# Altium PCB SRT-WREN-25-22-V103.PcbDoc
Units mm, origin at the board's own origin, x right, y up, seen from the top; angles counter-clockwise.
Board outline 30.73 x 24.64 mm, 2 copper layers (Top Layer, Bottom Layer); 21 components, 20 nets, 98 pads, 49 vias.
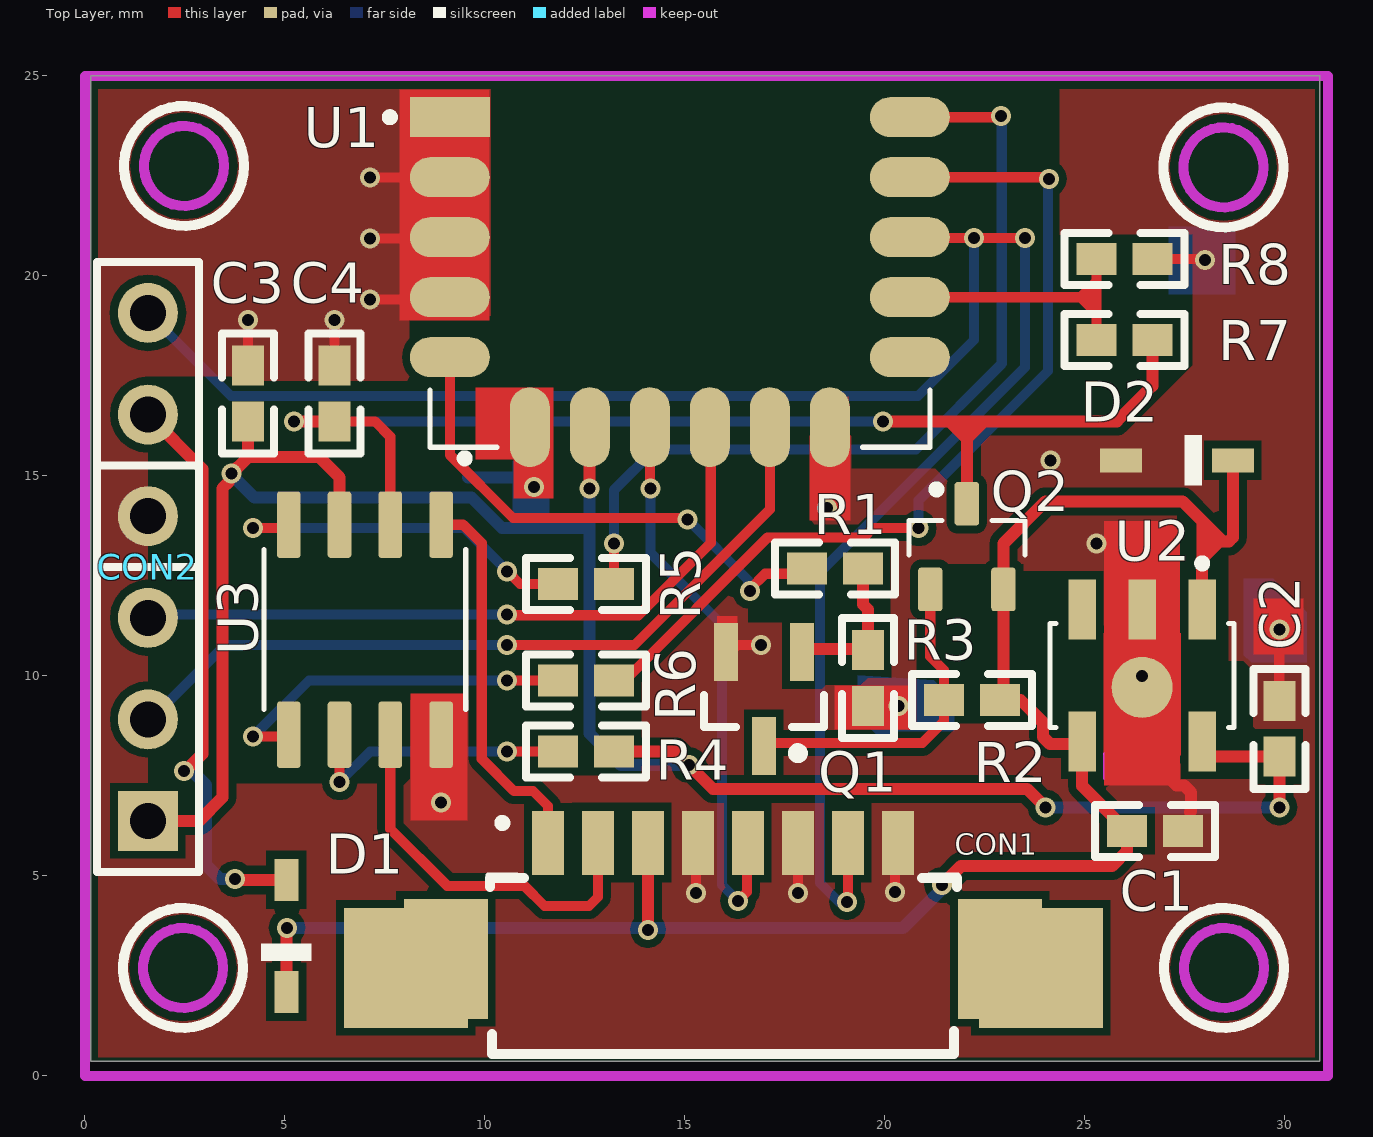
[diagram p0: Top Layer view]
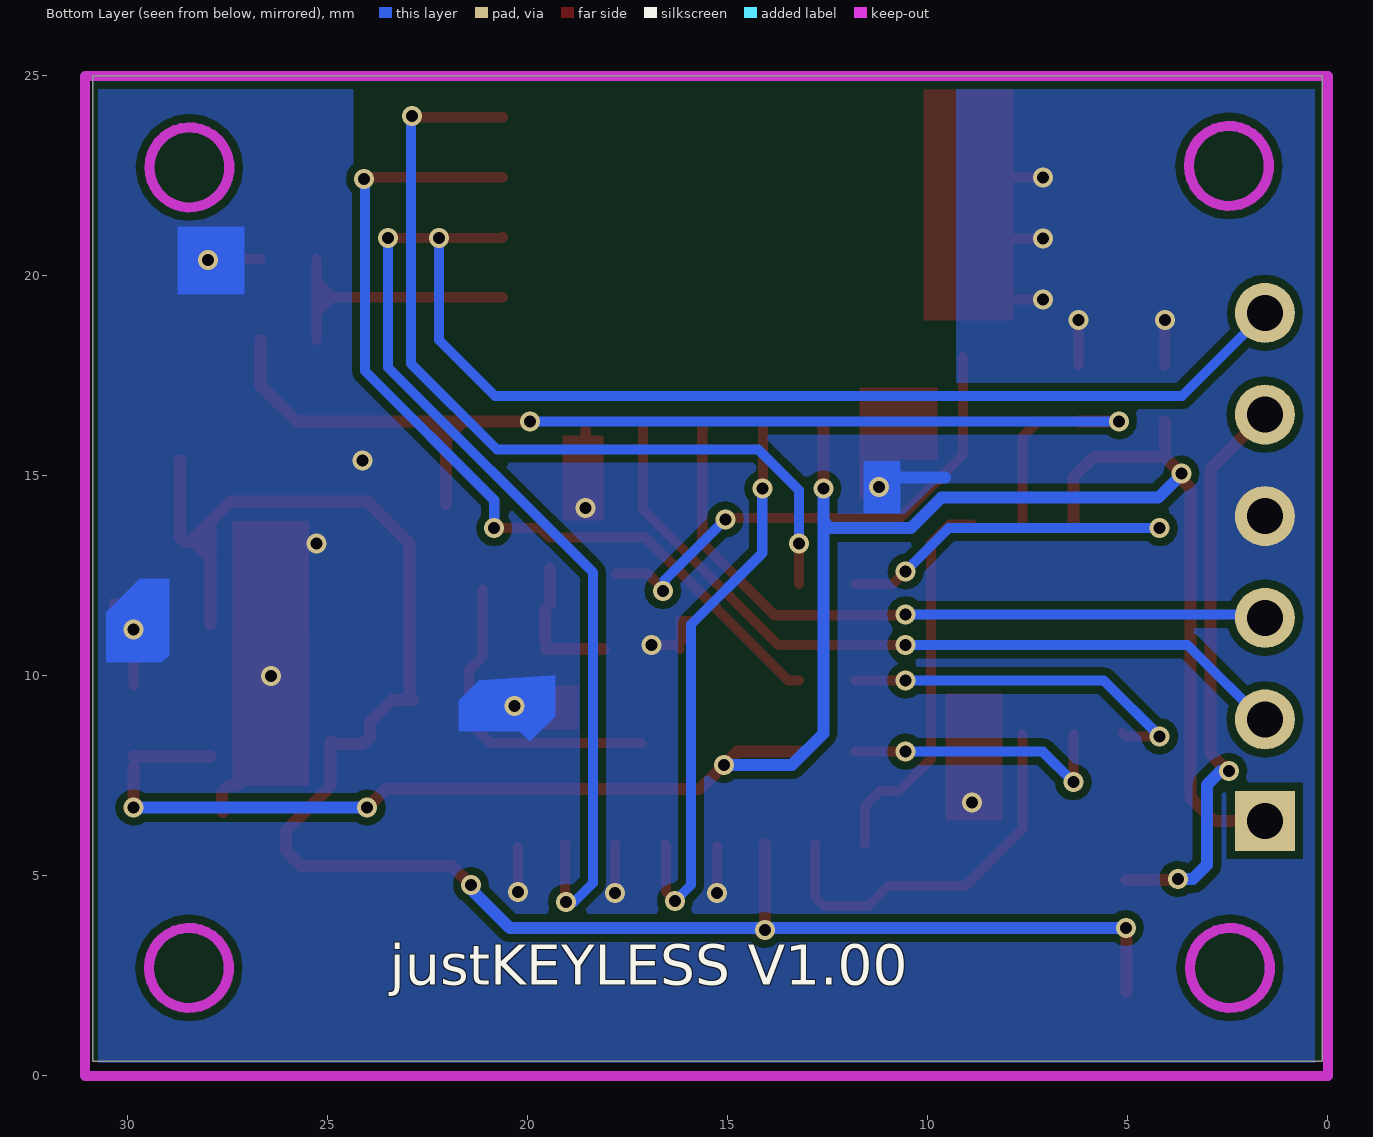
[diagram p1: Bottom Layer view, seen from below]

## Layer stack, top to bottom
Top Layer: signal copper 0.0356
Dielectric: dielectric 0.32, FR-4, Dk 4.8
Bottom Layer: signal copper 0.0356

## Board outline
0.141,25 0.141,0.362 30.875,0.362 30.875,25 0.141,25

## Design rules (kind name [scope] priority, off if disabled: settings)
Clearance [All] p1: gap=0.2
Clearance Clearance_2 [All] p2: gap=0.254
Clearance Clearance_1 [All] p3: gap=0.254
PolygonConnect [All] p1: connectstyle=Direct reliefconductorwidth=0.254 reliefentries=4 polygonreliefangle="90 Angle"
RoutingVias [All] p1: holewidth=0.5 width=0.3 viastyle="Through Hole" minholewidth=0.4 minwidth=0.2 maxholewidth=0.711 maxwidth=1.27
SilkToSilkClearance [All] p1: silktosilkclearance=0.054
SilkscreenOverComponentPads [IsPad] p1: minsilkscreentomaskgap=0.254
SolderMaskExpansion [All] p1: expansion=0.102
Width [InNet('FWD')] p1: maxlimit=0.3 minlimit=0.254 preferedwidth=0.254 minimp=50.000000 maximp=50.000000 favimp=50.000000
26 further rules are at their usual default settings.

## Components (designator, comment, footprint, x,y, rotation, side; value= is the part's Value field where it differs from the comment)
C1 "10uF" 0603_C 27.45,6.125 r180 top
C2 "10uF" 0603_C 29.859,9.379 r270 top
C3 "10uF" 0603_C 4.078,17.761 r270 top
C4 "10uF" 0603_C 6.237,17.761 r270 top
CON1 "8pin 1.25" "8Pin 1.25mm SMT" 11.575,5.8 r0 top
CON2 "6pin 2.54" "6PIN 2.54" 1.575,6.375 r90 top
D1 "1N4148WS" SOD323 5,3.725 r90 top
D2 "1N4148WS" SOD323 27.075,15.35 r180 top
Q1 "BC847" BC846 16.975,9.425 r270 top
Q2 "Q2" SOT_523_P_MOS 22.112,13.189 r90 top
R1 "10K" 0603_R 19.445,12.681 r180 top
R2 "10K" 0603_R 22.874,9.403 r180 top
R3 "10K(DNM)" 0603_R 19.572,9.252 r90 top
R4 "10K" 0603_R 11.825,8.109 r0 top
R5 "100E" 0603_R 11.825,12.3 r0 top
R6 "100E" 0603_R 11.825,9.887 r0 top
R7 "10K" 0603_R 26.684,18.396 r180 top
R8 "10K" 0603_R 25.287,20.428 r0 top
U1 "DA14531" DA14531 14.873,22.333 r0 top
U2 "XC6220B331PR-G" CONV_AL8861Y-13 26.43,10.014 r270 top
U3 "ZXBM5210" SOIC127P600X180-8N 6.999,11.157 r270 top

## Footprints (in the part's own frame and the unit in brackets; to place one, negate y for a bottom-side part, rotate by r counter-clockwise, add the part's x,y. Pads: shape width x height; smd on the part's side, far side on the other; paste and mask are expansions set on the pad)
"6PIN 2.54" [mm]
  rect 1.5x1.5 hole 0.9: 1(0,0)
  round 1.5 hole 0.9: 2(2.54,0) 3(5.08,0) 4(7.62,0) 5(10.16,0) 6(12.7,0)
  silkscreen extent -1.27,-1.27 13.97,1.27
"8Pin 1.25mm SMT" [mm]
  rect 0.8x1.6 smd: 1(0,0.025) 2(1.25,0.025) 3(2.5,0.025) 4(3.75,0.025) 5(5,0.025) 6(6.25,0.025) 7(7.5,0.025) 8(8.75,0.025)
  rect 3.1x3 smd: ""(-3.55,-3.1) ""(12.326,-3.1)
  rect 2.1x3 smd: ""(-2.55,-2.875) ""(11.3,-2.875)
  silkscreen extent -1.5,-5.25 10.25,0.62
0603_C [mm]
  rect 1x0.8 smd: 1(0,0) 2(1.397,0)
  silkscreen extent -0.8,-0.65 2.2,0.65
0603_R [mm]
  rect 1x0.8 smd: 1(0,0) 2(1.397,0)
  silkscreen extent -0.8,-0.65 2.2,0.65
BC846 [mm]
  rect 1.45x0.6 smd: 1(1.181,-0.002) 2(-1.169,-0.952) 3(-1.169,0.948)
  silkscreen extent -0.09,-1.5 1.48,1.5, body extent -0.69,-1.5 0.71,1.5, height 1.1
CONV_AL8861Y-13 [mm]
  rect 1.5x0.68 smd: 1(-1.65,1.5) 3(-1.65,-1.5) 4(1.65,-1.5) 5(1.65,1.5)
  rect 1.5x0.68 smd paste-2 mask+0: 2(-1.65,0)
  round 1.524 smd: 2(0.3,0)
  Top Layer region: 2,-0.965 -1.05,-0.965 -1.05,-0.34 -2.25,-0.34 -2.25,0.34 -1.05,0.34 -1.05,0.965 2,0.965
  silkscreen extent -2.9,-2.3 1.3,2.3
DA14531 [mm]
  rect 0.1x0.1 smd paste-1 mask+0: J1(-5.75,1.635) J2(-5.75,0.135) J3(-5.75,-1.365) J4(-5.75,-2.865) J5(-5.75,-4.365) J6(-3.75,-6.115) J7(-2.25,-6.115) J8(-0.75,-6.115) J9(0.75,-6.115) J10(2.25,-6.115) J11(3.75,-6.115) J12(5.75,-4.365) J13(5.75,-2.865) J14(5.75,-1.365) J15(5.75,0.135) J16(5.75,1.635)
  rect 2x1 smd: J1(-5.75,1.635)
  oval 2x1 smd: J2(-5.75,0.135) J3(-5.75,-1.365) J4(-5.75,-2.865) J5(-5.75,-4.365) J12(5.75,-4.365) J13(5.75,-2.865) J14(5.75,-1.365) J15(5.75,0.135) J16(5.75,1.635)
  oval 1x2 smd: J6(-3.75,-6.115) J7(-2.25,-6.115) J8(-0.75,-6.115) J9(0.75,-6.115) J10(2.25,-6.115) J11(3.75,-6.115)
  silkscreen extent -7.35,-6.62 6.25,1.73
SOD323 [mm]
  rect 1.05x0.6 smd: A(1.176,-0.037) C(-1.624,-0.037)
  silkscreen extent -0.85,-0.66 -0.42,0.59
SOIC127P600X180-8N [mm]
  rrect25% 1.66x0.59 smd: 1(-2.625,1.905) 2(-2.625,0.635) 3(-2.625,-0.635) 4(-2.625,-1.905) 5(2.625,-1.905) 6(2.625,-0.635) 7(2.625,0.635) 8(2.625,1.905)
  silkscreen extent -4.38,-2.52 2,2.59
SOT_523_P_MOS [mm]
  rrect25% 1.09x0.61 smd: 1(1.115,0.065) 2(-1.025,0.98) 3(-1.025,-0.85)
  silkscreen extent -0.16,-1.39 1.57,1.51

## Part data
C1 C2 C3 C4: library part Cap, "Capacitor"
D1 D2: library part 1N4148W-TP, "Diode Standard 100V 150mA Surface Mount SOD-123"
Q1: library part BC846X
Q2: library part PMOS
R1 R2 R3 R4 R5 R6 R7 R8: library part Res3, "Resistor"
U2: library part Component_1

## Via types
v1: diameter 0.5, hole 0.3, Top Layer to Bottom Layer, 49 vias

## Nets (pads, with @x,y where several pads share a name; then routed paths per layer and width w, separated by ;. In a path a pad name is that pad's centre, name@x,y a point inside that pad or via, vN(x,y) a via of type N, cw(c..) or ccw(c..) an arc to the next point about the centre after c; other vN are vias at no path point)
3V3: C2.2 C3.2 CON2.1 R4.2 U1.J7 U2.5 U3.3 | length 55.5
  Top Layer w0.3: CON2.1 2.85,6.375 3.436,6.961 3.436,14.691 v1@3.605,14.861 ; v1@3.627,15.024 4.078,15.475 ; C3.2 4.078,15.475 ; U3.3 6.364,14.964 5.853,15.475 4.078,15.475 ; v1(12.616,14.687) 12.616,16.211 U1.J7@12.623,16.218 ; R4.2 14.766,8.109 15.706,7.169 17.418,7.169 17.424,7.175 23.554,7.175 v1(24.017,6.712) ; U2.5@27.93,7.983 27.931,7.982 C2.2 ; v1(29.859,6.712) C2.2@29.859,7.733
  Bottom Layer w0.3: v1(3.665,15.062) 3.665,15.033 4.239,14.459 9.666,14.459 10.428,13.697 12.44,13.697 12.616,13.873 ; v1(12.616,14.687) 12.616,13.873 ; v1(15.1,7.775) 13.4,7.775 12.616,8.559 12.616,13.873 ; v1(24.017,6.712) v1(29.859,6.712)
+VBAT: C1.2 CON1.3 D1.C D2.C Q2.3 R2.1 U2.1 U2.4 | length 46.4
  Top Layer w0.3: D1.C v1@5.037,3.687 ; v1(14.075,3.65) CON1.3@14.075,5.8 ; v1(21.425,4.775) 21.9,5.25 25.675,5.25 26.053,5.628 C1.2 24.93,7.248 U2.4 24.866,8.3 24.126,8.3 23.95,8.476 23.95,8.836 23.383,9.403 R2.1 22.962,9.491 Q2.3 22.962,13.313 24.011,14.362 27.441,14.362 28.441,13.362 ; U2.1@27.93,11.283 U2.1 27.93,12.932 28.36,13.362 28.441,13.362 ; D2.C 28.699,13.466 28.595,13.362 28.441,13.362
  Bottom Layer w0.3: v1(5.05,3.7) 20.45,3.7 21.425,4.675 v1(21.425,4.775)
+VM: C4.2 Q2.1 R7.1 U3.2 | length 29.8
  Top Layer w0.254: C4.2 7.253,16.364 7.634,15.983 U3.2
  Top Layer w0.3: v1(5.221,16.364) C4.2 ; v1(19.953,16.364) 22.047,16.364 ; Q2.1 22.047,16.364 ; R7.1 26.684,17.253 25.795,16.364 22.047,16.364
  Bottom Layer w0.254: v1(5.221,16.364) v1(19.953,16.364)
FB1: CON1.7 CON2.6 U1.J14 | length 48.1
  Top Layer w0.254: v1(19.05,4.35) 19.075,4.375 CON1.7@19.075,5.8 ; U1.J14@20.623,20.968 20.641,20.95 v1(22.225,20.95) v1(23.498,20.95)
  Bottom Layer w0.254: CON2.6 3.65,17 20.825,17 22.225,18.4 v1(22.225,20.95) ; v1(19.05,4.35) 18.85,4.35 18.375,4.825 18.375,12.591 23.498,17.714 v1(23.498,20.95)
FB2: CON1.5 U1.J8 | length 14.3
  Top Layer w0.254: v1@14.123,14.705 U1.J8@14.123,16.218 ; v1(16.325,4.375) 16.55,4.6 16.55,5.775 CON1.5@16.575,5.8
  Bottom Layer w0.254: v1(14.141,14.687) 14.141,13.07 15.925,11.286 15.925,4.775 v1(16.325,4.375)
FWD: R5.2 U1.J16 | length 21.9
  Top Layer w0.254: R5.2 v1(13.222,13.316) ; U1.J16@20.623,23.968 v1@22.9,23.968
  Bottom Layer w0.254: v1(13.222,13.316) 13.222,14.643 14.241,15.662 20.775,15.662 22.921,17.808 v1@22.921,24.064
  other v1: 22.9,24
GND: C1.1 C2.1 C3.1 C4.1 CON1.4 CON1.6 CON1.8 CON2.4 D2.A Q1.2 R3.1 R8.2 U1.J1 U1.J2 U1.J3 U1.J4 U1.J6 U1.J11 U2.2 U3.8 | length 29
  Top Layer w0.254: C3.1 v1(4.078,18.904) ; C4.1 v1(6.237,18.904) ; v1(7.126,19.412) 9.067,19.412 U1.J4@9.123,19.468 ; v1(7.126,20.936) 9.091,20.936 U1.J3@9.123,20.968 ; v1(7.126,22.46) 9.115,22.46 U1.J2@9.123,22.468 ; v1(8.904,6.839) U3.8 ; U1.J6@11.123,16.218 11.266,16.075 11.266,15.184 11.3,15.15 11.225,15.075 v1(11.225,14.725) ; v1(15.275,4.575) CON1.4@15.275,5.75 ; Q1.2@16.207,10.675 16.308,10.776 v1(16.905,10.776) ; v1(17.825,4.575) CON1.6@17.825,5.8 ; U1.J11@18.556,16.151 v1(18.556,14.205) v1@18.625,14.274 ; R3.1 v1(20.334,9.252) 20.334,9.622 ; v1(20.25,4.6) CON1.8@20.25,5.725 ; v1(24.141,15.387) v1@24.18,15.348 ; v1(25.287,13.316) 26.43,13.316 ; R8.2 27.972,20.428 v1(28,20.4) ; C2.1@29.859,9.76 v1(29.859,11.157)
  Top Layer w0.3: U2.2@26.43,10.014 26.43,9.714 26.43,8.12 27.286,7.264 27.474,7.264 27.65,7.088 27.65,6.625 27.625,6.6
  Bottom Layer w0.3: 9.576,14.959 11.169,14.959 v1@11.466,14.662
  other v1: 26.425,10
M1: CON1.1 U3.1 | length 9.7
  Top Layer w0.254: U3.1 9.454,13.782 9.92,13.316 9.92,7.928 10.723,7.125 11.2,7.125 11.575,6.75 CON1.1@11.575,5.8
M2: CON1.2 U3.7 | length 9.8
  Top Layer w0.254: U3.7 7.634,6.175 9.057,4.752 10.986,4.752 11.488,4.25 12.6,4.25 12.825,4.475 CON1.2@12.825,5.8
NetCON2_5: CON2.5 D1.A | length 14.5
  Top Layer w0.3: CON2.5 2.936,15.174 2.936,8.051 2.51,7.625 v1(2.475,7.625) ; v1@3.774,4.901 D1.A
  Bottom Layer w0.3: v1(2.475,7.625) 2.675,7.625 3.025,7.275 3.025,5.275 3.375,4.925 v1(3.75,4.925)
NetQ1_1: Q1.1 Q2.2 R2.2 | length 8
  Top Layer w0.254: Q1.1@17.157,8.325 20.931,8.325 21.477,8.871 R2.2 21.477,10.141 21.132,10.486 Q2.2
NetQ1_3: Q1.3 R1.1 R3.2 | length 3.3
  Top Layer w0.3: Q1.3@18.107,10.675 R3.2@19.546,10.675 ; R1.1 19.445,11.792 19.572,11.665 R3.2@19.572,10.9
NetR5_1: R5.1 U3.4 | length 9.1
  Top Layer w0.254: v1@4.205,13.824 v1(4.205,13.697) U3.4@5.009,13.697 ; v1@10.566,12.612 10.878,12.3 R5.1
  Bottom Layer w0.254: v1(4.205,13.697) 9.481,13.697 v1@10.566,12.612
  other v1: 10.555,12.612
NetR6_1: R6.1 U3.5 | length 9.1
  Top Layer w0.254: v1(4.205,8.49) U3.5@5.052,8.49 ; U3.5 U3.5@5.136,8.574 ; v1@10.682,9.887 R6.1
  Bottom Layer w0.254: v1(4.205,8.49) 5.602,9.887 v1(10.555,9.887) v1@10.682,9.887
REV: R6.2 U1.J15 | length 22.8
  Top Layer w0.254: R6.2 13.491,9.887 17.068,13.464 19.468,13.464 19.701,13.697 v1(20.842,13.697) ; U1.J15@20.623,22.468 24.057,22.468 v1(24.1,22.425)
  Bottom Layer w0.254: v1(20.842,13.697) 20.842,14.392 24.075,17.625 24.075,22.4 v1(24.1,22.425)
SWCLK: CON2.2 U1.J10 | length 19.9
  Top Layer w0.254: v1(10.555,10.776) 13.738,10.776 17.123,14.161 U1.J10@17.123,16.218
  Bottom Layer w0.254: CON2.2@1.525,8.79 3.511,10.776 v1(10.555,10.776)
SWDIO: CON2.3 U1.J9 | length 17.9
  Top Layer w0.254: v1(10.555,11.538) 10.574,11.519 13.839,11.519 15.643,13.323 15.643,16.198 U1.J9@15.623,16.218
  Bottom Layer w0.254: CON2.3@1.525,11.33 1.733,11.538 v1(10.555,11.538)
VADC: R7.2 R8.1 U1.J13 | length 6.7
  Top Layer w0.254: U1.J13@20.623,19.468 25.231,19.468 25.287,19.412 ; R7.2 25.287,19.412 ; R8.1 25.287,19.412
VM_EN: R1.2 U1.J5 | length 12.8
  Top Layer w0.254: U1.J5@9.123,17.968 9.123,15.53 10.702,13.951 v1@15.027,13.951 ; v1(16.625,12.125) 16.625,12.172 17.007,12.554 R1.2@17.794,12.554
  Bottom Layer w0.254: v1(15.066,13.912) 16.578,12.4 16.578,12.172 v1(16.625,12.125)
VREF: R4.1 U3.6 | length 6.7
  Top Layer w0.254: v1(6.364,7.347) U3.6 ; 10.809,8.109 R4.1
  Bottom Layer w0.254: v1(6.364,7.347) 7.126,8.109 v1(10.555,8.109)
pads on no net: CON1. U1.J12 U2.3

## Polygon pours and split planes (outlines as drawn)
GND on Bottom Layer "Top Layer-GND" (solid, remove dead copper, pour order 13): 0.218,24.907 9.287,24.907 9.287,16.217 20.91,16.217 20.91,24.907 31,24.907 30.872,24.779 30.872,0.242 0.346,0.242 0.218,0.369 0.218,2.67 0.218,24.907
GND on Top Layer "Top Layer-GND" (solid, remove dead copper, pour order 11): 0.235,24.98 10.141,24.98 10.141,20.662 10.141,19.011 8.109,19.011 8.109,16.979 24.365,16.979 24.365,24.98 30.842,24.98 30.969,24.853 30.969,0.469 0.235,0.469 0.235,24.98

## Keep-outs
Top Layer:
  rectangle: 25.47,7.414 25.475,8.075
Keep-Out Layer:
  circle w0.254: c2.475,22.751 r1
  circle w0.254: c2.45,2.701 r1
  circle w0.254: c28.475,2.701 r1
  circle w0.254: c28.462,22.714 r1
  lines w0.254: 0,0 0,25 31.074,25 31.074,0 0,0

## Other copper
Top Layer:
  rectangle net GND: 15.8,10.776 16.308,11.5
  rectangle net +VBAT: 27.791,12.987 28.191,13.837
  rectangle net GND: 10.716,14.437 11.716,17.212
  rectangle net GND: 7.866,18.887 10.116,24.662
  rectangle net GND: 8.141,6.389 9.566,9.562
  rectangle net GND: 26.09,11.883 26.766,13.587
  rectangle net GND: 18.116,13.887 19.141,16.012
  rectangle net GND: 29.216,10.537 30.466,11.937
  rectangle net GND: 18.741,8.662 20.641,9.762
  rectangle net GND: 9.766,15.412 10.825,17.212
  rectangle net GND: 25.475,7.264 27.38,13.875
  pour cut-out: 19.075,17.25 19.125,16.314 25.9,16.6 26.4,17.1 26.4,17.925 26.425,17.95 22.75,17.95 22.425,17.625
  region net +VM: 21.412,16.364 22.047,15.729 22.682,16.364
  region net VADC: 25.358,20.103 24.723,19.468 25.358,18.833
  pour cut-out: 15.891,11.412 16.266,11.412 15.891,11.037
  pour cut-out: 3.85,13.75 3.85,9.122 4.172,8.8 8.134,8.8 8.134,9.396 9.566,9.396 9.566,13.67 9.454,13.782
  pour cut-out: 18.171,16.979 18.3,14.9 18.117,13.642 17.939,13.464 17.068,13.464 17.068,16.979
  pour cut-out: 19.125,16.6 19.125,16.028 19.161,15.992 19.161,15.18 21.258,15.18 21.558,14.881 21.652,14.975 21.95,14.975 21.95,15.538 21.338,16.15 19.95,16.15
  pour cut-out: 23.319,10.003 25.372,10.003 25.4,9.975 25.261,9.836 25.261,9.314 24.39,9.314 24.39,9.019 24.3,8.929 24.3,8.75 24.036,8.75 23.319,9.467
  pour cut-out: 16.575,11.325 16.575,12.122 16.816,12.363 17.098,12.081 20.145,12.081 20.145,11.376 20.172,11.349 20.172,10.006 19.631,10.006 19.375,9.75 19.363,9.762 18.516,9.762 18.423,9.669 17.423,9.669 17.423,11.323 17.425,11.325 16.6,11.325
  pour cut-out: 24.1,21.025 27.7,21.025 27.7,17.764 26.936,17.001 26.375,17.8 26.4,17.8 24.289,17.796 23.975,17.875 23.875,18.5 23.8,18.775 24.325,18.925 24.025,19.225 24.1,19.3
  pour cut-out: 6.891,17.007 6.898,17 8.872,17 11.825,14.047 11.825,13.825 12.95,13.825 13.475,13.3 13.475,12.8 13.4,12.8 13,12.4 12.975,12.425 6.925,12.425
  pour cut-out: 1.575,17.493 1.575,7.3 7.9,7.3 7.95,7.25 8.134,7.434 8.134,14.624 7.925,14.833 9.175,17.375 3.775,17.375 3.65,17.5 3.643,17.493
  pour cut-out: 25.287,7.414 25.47,7.414 25.47,7.258 25.528,7.2 25.528,7.146 25.479,7.097 25.411,7.097 25.287,7.221
  pour cut-out: 28.47,7.625 28.259,7.414 29.127,7.414 29.259,7.282 29.259,7.625 28.47,7.625 29.259,7.625
  pour cut-out: 11.125,8.709 11.075,8.659 11.075,8.125 10.275,8.125 9.9,8.5 9.92,8.52 9.92,9.548 10.216,9.548 10.555,9.887 11.254,9.887 11.254,9.682 11.125,9.554 11.125,9.287 13.922,9.287 13.922,8.709 13.922,9.287 13.922,8.709
  pour cut-out: 20.799,11.434 20.777,11.413 20.777,10.003 25.372,10.003 25.4,9.975 25.475,10.05 25.475,12.609 25.451,12.633 23.472,12.633 23.472,12.802 20.886,12.802 20.795,12.893
  pour cut-out: 27.6,10.375 28.963,10.375 29.205,10.133 29.205,8.625 29.259,8.625 29.259,8.339 27.609,8.339 27.599,8.329
  pour cut-out: 27.293,14.005 27.293,11.032 27.372,10.953 27.793,10.953 27.793,13.835 27.791,13.837
  pour cut-out: 28.416,13.184 28.6,13 28.6,10.05 27.75,10.05 27.725,10.025 27.599,10.151 27.599,12.451 27.396,12.654
  pour cut-out: 8.975,17.575 9.375,17.175 9.375,15.2 9.65,15.2 11.025,13.825 12.95,13.825 12.95,16.525 11.8,17.675 11.8,17.8 9.3,17.8 9.175,17.675
Bottom Layer:
  rectangle net GND: 10.691,14.062 11.612,15.37
  rectangle net GND: 27.091,19.537 28.766,21.237
  region net GND: 28.97,12.427 29.709,12.427 30.542,11.595 30.542,10.338 29.154,10.338 28.97,10.522
  region net GND: 19.318,10.014 19.318,8.998 19.953,8.363 20.207,8.617 21.731,8.617 21.731,9.379 21.223,9.887
  pour cut-out: 20.625,25.175 20.75,25.05 20.75,18.225 20.825,17 23.15,18.225 23.275,18.1 24.365,19.19 24.365,25.215 24.4,25.25 24.325,25.325 20.95,25.325

## Silkscreen, mask and mechanical layers (free items; w line width, h text height)
Top Overlay:
  circle w0.254: c28.462,22.714 r1.5
  circle w0.254: c28.475,2.701 r1.5
  circle w0.254: c2.45,2.701 r1.5
  circle w0.254: c2.475,22.751 r1.5
Bottom Overlay:
  text "justKEYLESS V1.00" at 23.45,2.275 h1